# Altium PCB PCB_Awg.PcbDoc
Units mm, origin at the board's own origin, x right, y up, seen from the top; angles counter-clockwise.
Board outline 152.4 x 101.6 mm, 2 copper layers (Top Layer, Bottom Layer); 100 components, 70 nets, 284 pads, 0 vias.
Unrouted connection lines stored in the file: 197.
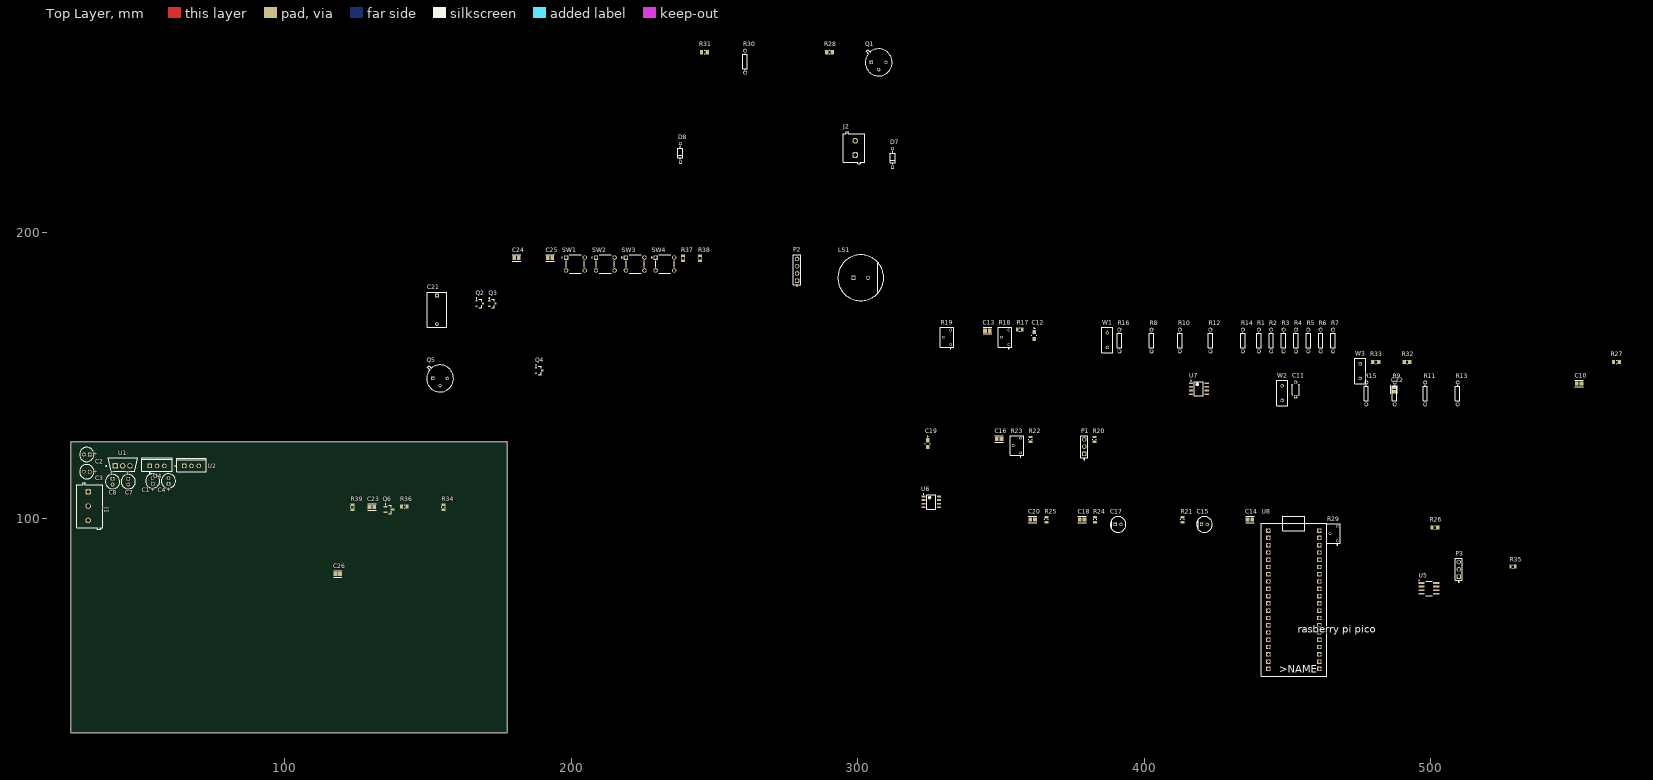
[diagram p0: Top Layer view]
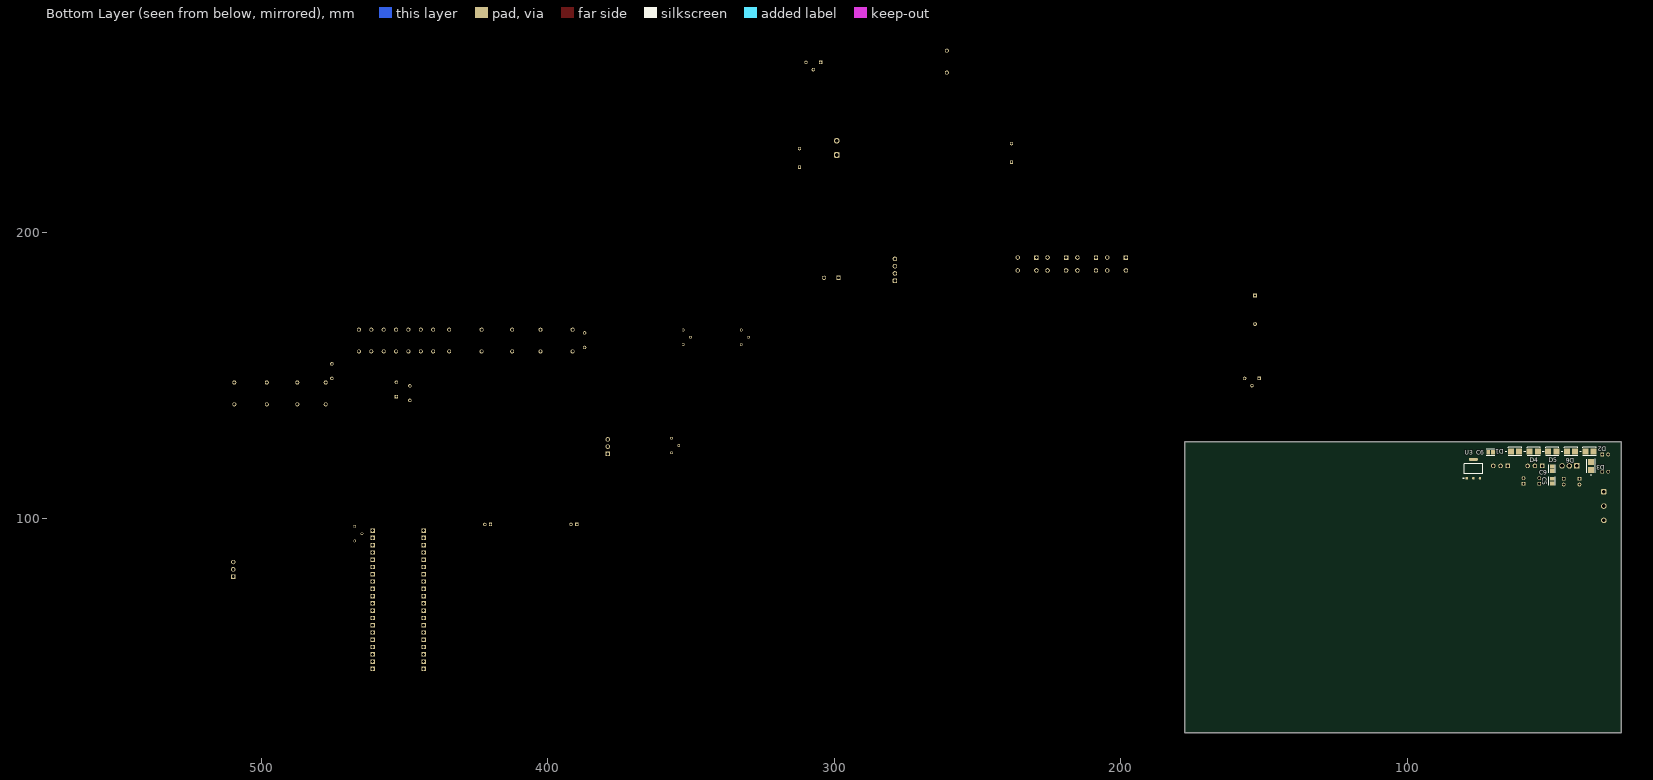
[diagram p1: Bottom Layer view, seen from below]

## Layer stack, top to bottom
Top Solder: solder mask 0.0102, Solder Resist, Dk 3.5
Top Layer: signal copper 0.0356
Dielectric 1: dielectric 0.32, FR-4, Dk 4.8
Bottom Layer: signal copper 0.0356
Bottom Solder: solder mask 0.0102, Solder Resist, Dk 3.5

## Board outline
25.4,25.4 177.8,25.4 177.8,127 25.4,127

## Design rules (kind name [scope] priority, off if disabled: settings)
Clearance [All] p1: gap=0.254 ignorepadtopadclearanceinfootprint=FALSE except(0: Arc-Hole Track-Hole SMDPad-Hole THPad-Hole Via-Hole Fill-Hole Poly-Hole Region-Hole Text-Hole)
PolygonConnect [All] p1: connectstyle=Relief reliefconductorwidth=0.254 reliefentries=4 polygonreliefangle="90 Angle" airgapwidth=0.254
RoomDefinition Alimentacion [InComponentClass('Alimentacion')] p1: confinementstyle=ConfineIn formatcopy=TRUE lockcomponents=FALSE outline 27,125.5 27,94.5 40,94.5 40,108 87,108 87,125.5
RoomDefinition Salida [InComponentClass('Salida')] p2: confinementstyle=ConfineIn formatcopy=TRUE lockcomponents=FALSE outline 34.2,55 85,55 85,80.4 34.2,80.4
RoomDefinition Control [InComponentClass('Control')] p3: confinementstyle=ConfineIn formatcopy=TRUE lockcomponents=FALSE outline 107.2,28.1 158,28.1 158,53.5 107.2,53.5
RoomDefinition Perifericos [InComponentClass('Perifericos')] p4: confinementstyle=ConfineIn formatcopy=TRUE lockcomponents=FALSE outline 178.943,162.941 309.499,162.941 309.499,211.963 178.943,211.963
RoutingVias [All] p1: holewidth=0.711 width=1.27 viastyle="Through Hole" minholewidth=0.711 minwidth=1.27 maxholewidth=0.711 maxwidth=1.27
SolderMaskExpansion [All] p1: expansion=0.102 istentingtop=FALSE
Width [All] p1: maxlimit=0.254 minlimit=0.254 preferedwidth=0.254
30 further rules are at their usual default settings.

## Classes and differential pairs
component class Salida: C21 C22 D7 D8 J2 Q1 Q2 Q3 Q4 Q5 R26 R27 R28 R29 R30 R31 R32 R33 W3
component class Perifericos: C23 C24 C25 C26 LS1 P2 P3 Q6 R34 R35 R36 R37 R38 R39 SW1 SW2 SW3 SW4
component class Control: C10 C11 C12 C13 C14 C15 C16 C17 C18 C19 C20 P1 R1 R2 R3 R4 R5 R6 R7 R8 R9 R10 R11 R12 R13 R14 R15 R16 R17 R18 R19 R20 R21 R22 R23 R24 R25 U5 U6 U7 U8 W1 W2
component class Alimentacion: C1 C2 C3 C4 C5 C6 C7 C8 C9 D1 D2 D3 D4 D5 D6 J1 U1 U2 U3 U4

## Components (designator, comment, footprint, x,y, rotation, side; value= is the part's Value field where it differs from the comment)
C1 "0.33uF" CAPPR55-200-1100X500X1200 54,113.25 r90 top
C2 "0.33uF" CAPPR55-200-1100X500X1200 31,122.5 r180 top
C3 "1uF" CAPPR55-200-1100X500X1200 31,116.5 r180 top
C4 "1uF" CAPPR55-200-1100X500X1200 59.5,113.25 r90 top
C5 "100nF" FP-0805-L_2_01_0_2-W_1_25-IPC_B 49.5,113.194 r90 bottom
C6 "100nF" FP-0805-L_2_01_0_2-W_1_25-IPC_B 71,123.25 r180 bottom
C7 "0.33uF" CAPPR55-200-1100X500X1200 45.5,113 r270 top
C8 "1uF" CAPPR55-200-1100X500X1200 40,113 r270 top
C9 "100nF" FP-0805-L_2_01_0_2-W_1_25-IPC_B 49.5,117.5 r90 bottom
C10 "22pF" FP-0805-L_2_01_0_2-W_1_25-IPC_B 551.835,147.236 r0 top
C11 "10nF/Poliester-Ceramico" FP-RCE0K1-MFG 452.902,145.204 r90 top
C12 "2.2uF/Tantalio" FP-T491A225K010AT-MFG 361.68,164.038 r90 top
C13 "10nF/Ceramico" FP-0805-L_2_01_0_2-W_1_25-IPC_B 345.297,165.689 r0 top
C14 "22pF" FP-0805-L_2_01_0_2-W_1_25-IPC_B 436.9,99.865 r0 top
C15 "10uF" FP-RAD-TH-D_5_0_5-L_11_1-MFG 421.025,98.087 r0 top
C16 "10nF/Ceramico" FP-0805-L_2_01_0_2-W_1_25-IPC_B 349.393,127.91 r0 top
C17 "10uF" FP-RAD-TH-D_5_0_5-L_11_1-MFG 390.926,98.087 r0 top
C18 "100nF" FP-0805-L_2_01_0_2-W_1_25-IPC_B 378.353,99.865 r0 top
C19 "2.2uF/Tantalio" FP-T491A225K010AT-MFG 324.501,126.259 r90 top
C20 "100nF" FP-0805-L_2_01_0_2-W_1_25-IPC_B 361.081,99.865 r0 top
C21 "Desacople" FP-ECQ-E2564KB-MFG 153.2,173 r270 top
C22 "100nF" FP-0805-L_2_01_0_2-W_1_25-IPC_B 487.2,145.194 r90 top
C23 "100nF" FP-0805-L_2_01_0_2-W_1_25-IPC_B 130.513,104.201 r0 top
C24 "100nF" FP-0805-L_2_01_0_2-W_1_25-IPC_B 180.975,191.135 r0 top
C25 "100nF" FP-0805-L_2_01_0_2-W_1_25-IPC_B 192.659,191.135 r0 top
C26 "100nF" FP-0805-L_2_01_0_2-W_1_25-IPC_B 118.575,80.833 r0 top
D1 "1N4007 SMD" FP-1N4007_SMD-IPC_C 62.5,123.5 r180 bottom
D2 "1N4007 SMD" FP-1N4007_SMD-IPC_C 36.5,123.5 r180 bottom
D3 "1N4007 SMD" FP-1N4007_SMD-IPC_C 36,118.45 r90 bottom
D4 "1N4007 SMD" FP-1N4007_SMD-IPC_C 55.95,123.5 r180 bottom
D5 "1N4007 SMD" FP-1N4007_SMD-IPC_C 49.5,123.5 r180 bottom
D6 "1N4007 SMD" FP-1N4007_SMD-IPC_C 42.95,123.5 r180 bottom
D7 "1N4148TR" FP-6_560-5004_12-4-MFG 312.2,226 r90 top
D8 "1N4148TR" FP-6_560-5004_12-4-MFG 238.2,227.75 r90 top
J1 "691101710003" 691101710003 32,104.5 r270 top
J2 "Señal_Salida" 691102710002 298.75,229.5 r90 top
LS1 "Buzzer 5V" FP-SDC1610M5-01-MFG 301.117,184.15 r0 top
P1 "J_Etapa_Realm" MOLX-22-28-4033_V 379.111,125.243 r90 top
P2 "61300411121" 61300411121 278.892,186.944 r90 top
P3 "22-28-4033" MOLX-22-28-4033_V 509.822,82.423 r90 top
Q1 "2N2219A" FP-TO-39-MFG 307.377,259.343 r0 top
Q2 "BC847B" INF-SOT23_L 168.142,175.203 r0 top
Q3 "BC847B" INF-SOT23_L 172.587,175.203 r0 top
Q4 "BC847B" INF-SOT23_L 188.843,151.835 r0 top
Q5 "2N2905A" FP-TO-39-MFG 154.299,149.041 r0 top
Q6 "BC847B" INF-SOT23_M 136.482,103.312 r0 top
R1 "Res1" AXIAL-0.3 440.039,162.26 r90 top value=1.2K
R2 "Res1" AXIAL-0.3 444.357,162.26 r90 top value=1.2K
R3 "Res1" AXIAL-0.3 448.675,162.26 r90 top value=1.2K
R4 "Res1" AXIAL-0.3 452.993,162.26 r90 top value=1.2K
R5 "Res1" AXIAL-0.3 457.311,162.26 r90 top value=1.2K
R6 "Res1" AXIAL-0.3 461.629,162.26 r90 top value=1.2K
R7 "Res1" AXIAL-0.3 465.947,162.26 r90 top value=1.2k
R8 "Res1" AXIAL-0.3 402.574,162.26 r90 top value=2.4K
R9 "Res1" AXIAL-0.3 487.446,143.807 r90 top value=2.4K
R10 "Res1" AXIAL-0.3 412.48,162.26 r90 top value=2.4K
R11 "Res1" AXIAL-0.3 498.114,143.807 r90 top value=2.4K
R12 "Res1" AXIAL-0.3 423.148,162.26 r90 top value=2.4K
R13 "Res1" AXIAL-0.3 509.417,143.807 r90 top value=2.4K
R14 "MSB" AXIAL-0.3 434.451,162.26 r90 top value=2.4K
R15 "LSB" AXIAL-0.3 477.54,143.807 r90 top value=2.4K
R16 "Res1" AXIAL-0.3 391.398,162.26 r90 top value=2.4K
R17 "2.2k" RESC2013X50X30LL20T20 356.6,166.07 r0 top
R18 "10k" BOUR-3266W-3_V 351.52,163.403 r90 top
R19 "10k" BOUR-3266W-3_V 331.2,163.403 r90 top
R20 "1k" RESC2013X50X30LL20T20 382.667,127.783 r90 top
R21 "10k" RESC2013X50X30LL20T20 413.405,99.738 r90 top
R22 "10k" RESC2013X50X30LL20T20 360.315,127.783 r90 top
R23 "10k" BOUR-3266W-3_V 355.616,125.624 r90 top
R24 "10k" RESC2013X50X30LL20T20 382.925,99.738 r90 top
R25 "2.2k" RESC2013X50X30LL20T20 365.907,99.738 r90 top
R26 "33k" RESC2013X60X35ML10T20 501.477,97.037 r0 top
R27 "33k" RESC2013X60X35ML10T20 564.807,154.756 r0 top
R28 "0.33" RESC2013X60X35ML10T20 290.232,262.899 r0 top
R29 "10k" BOUR-3266W-3_V 466.171,94.878 r90 top
R30 "Res1" AXIAL-0.3 260.768,259.597 r90 top value=50-1%
R31 "0.33" RESC2013X60X35ML10T20 246.544,262.899 r0 top
R32 "10" RESC2013X60X35ML10T20 491.782,154.756 r0 top
R33 "0.33" RESC2013X60X35ML10T20 480.86,154.756 r0 top
R34 "10k" RESC2013X50X30LL20T20 155.532,104.074 r90 top
R35 "10k" RESC2013X50X30LL20T20 528.702,83.373 r0 top
R36 "5.6k" RESC2013X50X30NL20T20 141.816,104.328 r0 top
R37 "10k" RESC2013X50X30LL20T20 239.141,191.008 r90 top
R38 "10k" RESC2013X50X30LL20T20 244.983,191.008 r90 top
R39 "10k" RESC2013X50X30LL20T20 123.782,104.074 r90 top
SW1 "RUN" FP-EVQ-PAC07K-MFG 201.549,188.976 r0 top
SW2 "AVANCE" FP-EVQ-PAC07K-MFG 211.963,188.976 r0 top
SW3 "ATRAS" FP-EVQ-PAC07K-MFG 222.377,188.976 r0 top
SW4 "MULT/START" FP-EVQ-PAC07K-MFG 232.791,188.976 r0 top
U1 "LM7815CT/NOPB" FP-NDE0003B-MFG 43.54,119.072 r90 top
U2 "LM7805CT" FAIR-TO-220-3 67.54,118.5 r90 top
U3 "AMS1117-3.3" FP-AMS1117-IPC_C 77,117.5 r90 bottom
U4 "LM7915CT/NOPB" NDE0003A 55.54,118.5 r0 top
U5 "X9C103SIZT1" M8_15_MFG 499.375,75.77 r0 top
U6 "LM6172" D0008A_N 325.726,105.964 r0 top
U7 "LM358" ONSC-SOIC-8-751-07_V 419.12,145.458 r0 top
U8 "RASPBERRY_PI_PICO" RASPBERRY_PI_PICO 452.267,73.068 r0 top
W1 "J_Etapa1" RAD-0.2 387.207,162.387 r90 top
W2 "J_Etapa2" RAD-0.2 448.203,143.934 r90 top
W3 "Jumper" RAD-0.2 475.399,151.581 r90 top

## Footprints (in the part's own frame and the unit in brackets; to place one, negate y for a bottom-side part, rotate by r counter-clockwise, add the part's x,y. Pads: shape width x height; smd on the part's side, far side on the other; paste and mask are expansions set on the pad)
61300411121 [mm] "Pin Header, pitch 2.54 mm, THT, Vertical, single row, 4p"
  rrect50% 1.6x1.6 hole 1.1: 1(-3.81,0)
  round 1.6 hole 1.1: 2(-1.27,0) 3(1.27,0) 4(3.81,0)
  silkscreen extent -5.8,-1.35 5.23,1.35, body extent -5.08,-1.27 5.08,1.27, height 8.57
691101710003 [mm] "5,00mm - modular - blue - Horizontal entry with pressure clamp - 12,6mm height - 03p"
  rrect50% 1.95x1.95 hole 1.3: 1(-5,-0.5)
  round 1.95 hole 1.3: 2(0,-0.5) 3(5,-0.5)
  silkscreen extent -8.1,-4.5 8.1,4.5, body extent -8.1,-4.5 8.1,4.5, height 12.65
691102710002 [mm] "5,00mm - modular - blue - Horizontal entry with pressure clamp - 9,9 mm height - 02p"
  rrect50% 1.95x1.95 hole 1.3: 1(-2.5,-0.45)
  round 1.95 hole 1.3: 2(2.5,-0.45)
  silkscreen extent -5.6,-3.75 5.6,3.75, body extent -5.6,-3.75 5.6,3.75, height 9.96
AXIAL-0.3 [mm] "Axial Device, Thru-Hole; 2 Leads; 0.3 in Pin Spacing"
  round 1.4 hole 0.85: 1(-3.81,0) 2(3.81,0)
  silkscreen extent -2.77,-0.76 2.77,0.76
BOUR-3266W-3_V [mm] "THD, 3-Leads, Body 6.6x4.69mm, Pitch 2.54mm"
  round 0.95 hole 0.65: 1(-2.54,-1.27) 2(0,1.27) 3(2.54,-1.27)
  silkscreen extent -4.02,-2.34 3.42,2.34, body extent -3.3,-2.35 3.3,2.35, height 8.51
CAPPR55-200-1100X500X1200 [mm] "THD, 2-Leads, Dia 5mm, Body Length 11mm"
  rect 1.3x1.3 hole 0.8: 1(-1,0)
  round 1.3 hole 0.8: 2(1,0)
  silkscreen extent -2.5,-2.5 2.5,2.5, body extent -2.5,-2.5 2.5,2.5, height 12
D0008A_N [mm] "SOIC, 8-Leads, Body 5x4mm, Pitch 1.27mm, IPC Medium Density"
  rrect17% 1.45x0.6 smd: 1(-2.725,1.905) 2(-2.725,0.635) 3(-2.725,-0.635) 4(-2.725,-1.905) 5(2.725,-1.905) 6(2.725,-0.635) 7(2.725,0.635) 8(2.725,1.905)
  silkscreen extent -2.85,-2.5 1.6,2.88, body extent -3,-2.45 3,2.45, height 1.63
FAIR-TO-220-3 [mm] "FM, 3-Leads, Body 10.2x4.7mm, Pitch 2.54mm"
  rect 1.6x1.6 hole 1: 1(0,2.54)
  round 1.6 hole 1: 2(0,0) 3(0,-2.54)
  silkscreen extent -2.04,-5.1 2.66,5.87, body extent -2.04,-5.1 2.66,5.1, height 18.95
FP-1N4007_SMD-IPC_C [mm]
  rect 2.1x2 smd paste+0 mask+0: 1(-1.45,0) 2(1.45,0)
  silkscreen extent -3.25,-1.45 2.3,1.45, body extent -2.52,-1.35 2.52,1.35, height 2.62
FP-6_560-5004_12-4-MFG [mm]
  rect 1.2x1.2 hole 0.7 paste-1000 mask+0: 1(-3.25,0)
  round 1.2 hole 0.7 paste-1000 mask+0: 2(3.25,0)
  silkscreen extent -2.25,-0.87 2.25,0.87, body extent -3.95,-0.97 3.95,0.97, height 0.25
FP-0805-L_2_01_0_2-W_1_25-IPC_B [mm]
  rect 1.305x1.456 smd paste+0 mask+0: 1(-0.806,0) 2(0.806,0)
  silkscreen extent -1.46,-1.13 1.46,1.13, body extent -1,-0.63 1,0.63, height 1.4
FP-AMS1117-IPC_C [mm]
  rect 1.004x0.872 smd paste+0 mask+0: 1(-3.295,2.29)
  rrect100% 1.004x0.872 smd paste+0 mask+0: 2(-3.295,0) 3(-3.295,-2.29)
  rrect87% 1.004x3.182 smd paste+0 mask+0: 4(3.295,0)
  silkscreen extent -3.42,-3.25 1.75,3.63, body extent -3.53,-3.25 3.53,3.25, height 1.8
FP-ECQ-E2564KB-MFG [mm]
  rect 1.3x1.3 hole 0.8 paste-1000 mask+0: 1(-5,0)
  round 1.3 hole 0.8 paste-1000 mask+0: 2(5,0)
  silkscreen extent -6.15,-3.35 6.15,3.35, body extent -6.25,-3.45 6.25,3.45, height 0.25
FP-EVQ-PAC07K-MFG [mm]
  rect 1.55x1.55 hole 1 paste-1000 mask+0: A(-3.25,2.25)
  round 1.55 hole 1 paste-1000 mask+0: A'(-3.25,-2.25) B(3.25,2.25) B'(3.25,-2.25)
  silkscreen extent -4.77,-3.15 3.15,3.15, body extent -4.13,-3.25 4.13,3.25, height 0.25
FP-NDE0003B-MFG [mm]
  rect 1.9x1.9 hole 1.25 paste-1000 mask+0: 1(-0.573,2.54)
  round 1.9 hole 1.25 paste-1000 mask+0: 2(-0.573,0) 3(-0.573,-2.54)
  silkscreen extent -2.35,-5.27 2.35,5.89, body extent -2.45,-5.37 2.45,5.37, height 0.25
FP-RAD-TH-D_5_0_5-L_11_1-MFG [mm]
  rect 1.2x1.2 hole 0.7 paste-1000 mask+0: 1(-1,0)
  round 1.2 hole 0.7 paste-1000 mask+0: 2(1,0)
  silkscreen extent -2.75,-2.75 2.75,2.75, body extent -2.85,-2.85 2.85,2.85, height 0.25
FP-RCE0K1-MFG [mm]
  rect 1.2x1.2 hole 0.7 paste-1000 mask+0: 1(-2.5,0)
  round 1.2 hole 0.7 paste-1000 mask+0: 2(2.5,0)
  silkscreen extent -1.8,-1.25 1.8,1.25, body extent -3.2,-1.35 3.2,1.35, height 0.25
FP-SDC1610M5-01-MFG [mm]
  rect 1.45x1.45 hole 0.95 paste-1000 mask+0: 1(-2.5,0)
  round 1.45 hole 0.95 paste-1000 mask+0: 2(2.5,0)
  silkscreen extent -8,-8 8,8, body extent -8.1,-8.1 8.1,8.1, height 0.25
FP-T491A225K010AT-MFG [mm]
  rect 1.42x1.13 smd paste+0 mask+0: 1(-1.2,0) 2(1.2,0)
  silkscreen extent -0.12,-0.9 2.8,0.9, body extent -2.03,-1.02 2.03,1.02, height 0.25
FP-TO-39-MFG [mm]
  rect 1.2x1.2 hole 0.7 paste-1000 mask+0: 1(-2.54,0)
  round 1.2 hole 0.7 paste-1000 mask+0: 2(0,-2.54) 3(2.54,0)
  silkscreen extent -4.69,-4.7 4.7,4.69, body extent -4.8,-4.8 4.8,4.8, height 0.25
INF-SOT23_L [mm] "SOT23, 3-Leads, Body 2.9x1.3 mm, Pitch 0.95 mm, IPC High Density"
  rect 0.75x0.6 smd: 1(-1.1,0.95) 2(-1.1,-0.95) 3(1.1,0)
  silkscreen extent -1.22,-1.5 0.7,1.92, body extent -0.7,-1.5 0.7,1.5, height 1.1
INF-SOT23_M [mm] "SOT23, 3-Leads, Body 2.9x1.3 mm, Pitch 0.95 mm, IPC Low Density"
  rect 1.35x0.6 smd: 1(-1.2,0.95) 2(-1.2,-0.95) 3(1.2,0)
  silkscreen extent -1.32,-1.5 0.7,1.92, body extent -0.7,-1.5 0.7,1.5, height 1.1
M8_15_MFG [mm] "Recommended Land Pattern"
  rect 2.2x0.6 smd: 1(-2.6,1.905) 2(-2.6,0.635) 3(-2.6,-0.635) 4(-2.6,-1.905) 5(2.6,-1.905) 6(2.6,-0.635) 7(2.6,0.635) 8(2.6,1.905)
  silkscreen extent -3.57,-2.56 1.12,2.83, body extent -3.8,-2.75 3.8,2.75, height 0.25
MOLX-22-28-4033_V [mm] "THD, 3-Leads, Body 7.62x2.49mm, Pitch 2.54mm"
  rect 1.55x1.55 hole 1.02: 1(-2.54,0)
  round 1.55 hole 1.02: 2(0,0) 3(2.54,0)
  silkscreen extent -4.58,-1.24 3.81,1.24, body extent -3.81,-1.24 3.81,1.24, height 8.38
NDE0003A [mm] "FM, 3-Leads, Body 10.7x4.7mm, Pitch 2.54mm"
  rect 1.6x1.6 hole 1: 1(-2.54,0)
  round 1.6 hole 1: 2(0,0) 3(2.54,0)
  silkscreen extent -5.35,-2.62 5.35,2.85, body extent -5.4,-1.9 5.4,2.9, height 19.4
ONSC-SOIC-8-751-07_V [mm] "SOIC, 8-Leads, Body 4.9x3.9mm, Pitch 1.27mm"
  rect 1.52x0.6 smd: 1(-2.74,1.905) 2(-2.74,0.635) 3(-2.74,-0.635) 4(-2.74,-1.905) 5(2.74,-1.905) 6(2.74,-0.635) 7(2.74,0.635) 8(2.74,1.905)
  silkscreen extent -2.86,-2.45 1.58,2.88, body extent -1.95,-2.45 1.95,2.45, height 1.75
RAD-0.2 [mm] "Radial Cap, Thru-Hole; 2 Leads; 0.2 in Pin Spacing"
  round 1.2 hole 0.7: 1(-2.54,0) 2(2.54,0)
  silkscreen extent -4.44,-1.91 4.44,1.91
RASPBERRY_PI_PICO [mm]
  rect 1.508x1.508 / inner round 1.508 / far side rect 1.508x1.508 hole 1: 3V3(8.89,12.7) 3V3_EN(8.89,15.24) ADC_VREF(8.89,10.16) AGND(8.89,5.08) GND(8.89,17.78) GND2(8.89,-7.62) GND3(8.89,-20.32) GND4(-8.89,17.78) GND5(-8.89,5.08) GND6(-8.89,-7.62) GND7(-8.89,-20.32) GP0(-8.89,22.86) GP1(-8.89,20.32) GP2(-8.89,15.24) GP3(-8.89,12.7) GP4(-8.89,10.16) GP5(-8.89,7.62) GP6(-8.89,2.54) GP7(-8.89,0) GP8(-8.89,-2.54) GP9(-8.89,-5.08) GP10(-8.89,-10.16) GP11(-8.89,-12.7) GP12(-8.89,-15.24) GP13(-8.89,-17.78) GP14(-8.89,-22.86) GP15(-8.89,-25.4) GP16(8.89,-25.4) GP17(8.89,-22.86) GP18(8.89,-17.78) GP19(8.89,-15.24) GP20(8.89,-12.7) GP21(8.89,-10.16) GP22(8.89,-5.08) GP26_A0(8.89,0) GP27_A1(8.89,2.54) GP28_A2(8.89,7.62) RUN(8.89,-2.54) VBUS(8.89,22.86) VSYS(8.89,20.32)
  silkscreen extent -11.43,-27.94 11.43,27.94
RESC2013X50X30LL20T20 [mm] "Chip Resistor, 2-Leads, Body 2.00x1.25mm, IPC High Density"
  rect 0.85x1.35 smd: 1(-0.825,0) 2(0.825,0)
  silkscreen extent -0.1,-0.58 0.1,0.58, body extent -1.1,-0.72 1.1,0.72, height 0.5
RESC2013X50X30NL20T20 [mm] "Chip Resistor, 2-Leads, Body 2.00x1.25mm, IPC Medium Density"
  rect 1.05x1.45 smd: 1(-0.925,0) 2(0.925,0)
  silkscreen extent -0.1,-0.63 0.1,0.63, body extent -1.1,-0.72 1.1,0.72, height 0.5
RESC2013X60X35ML10T20 [mm] "Chip Resistor, 2-Leads, Body 2.1x1.35mm, IPC Low Density"
  rect 1.2x1.45 smd: 1(-1,0) 2(1,0)
  silkscreen extent -0.1,-0.63 0.1,0.63, body extent -1.05,-0.68 1.05,0.67, height 0.6

## Part data
C1 C2 C3 C4 C7 C8: library part CMP-1665-00039-1, "Aluminum Electrolytic Capacitor, 1 uF, +/- 20%, 50 V, -55 to 105 degC, 2-Pin THD, RoHS, Bulk", Max Operating Temperature="70 degC", Min Operating Temperature="-30 degC", Package Quantity=150, Channels=2, ComponentLink1Description="Manufacturer URL", ComponentLink1URL=http://www.panasonic.com/, ComponentLink2Description=Datasheet, ComponentLink2URL=https://datasheet.ciiva.com/7275/94060-7275472.pdf, DatasheetVersion=Mar-05, Mount="Through Hole", PackageDescription="2-Pin Radial Lead, Dia 5 mm, Body Length 11 mm", PackageReference=CAPPR55-200-1100X500X1200, Packaging=Bulk, Radiation Hardening=No, RoHSCompliant=true
C5 C6 C9 C18 C20 C22 C23 C24 C25 C26: library part CMP-2007-04174-2, "General Purpose Ceramic Capacitor, 0805, 100nF, 10%, X7R, 15%, 100V", Case Code (Imperial)=0805, Case Code (Metric)=2012, Dielectric=X7R, Dielectric Material=Ceramic, Max Operating Temperature=125°C, Min Operating Temperature=-55°C, Package Quantity=2000, Tolerance=10%, Voltage=100V, Capacitance=100nF, Case/Package=0805, Construction=Flat, Contact Plating=Tin, Depth=1.25mm, Height=1.4mm, Lead Free="Lead Free", Length=2.01mm, Mount="Surface Mount", Number of Pins=2, Packaging="Tape and Reel", Radiation Hardening=No, REACH SVHC="No SVHC", RoHS Compliant=Yes, Series=-, Termination=SMD/SMT, Thickness=0.055inch, Voltage Rating=100V, Voltage Rating (DC)=100V, Width=0.049inch
C10 C13 C14 C16: library part CMP-2007-04174-2, "General Purpose Ceramic Capacitor, 0805, 100nF, 10%, X7R, 15%, 100V", Capacitance=100nF, Case Code (Imperial)=0805, Case Code (Metric)=2012, Dielectric=X7R, Dielectric Material=Ceramic, Max Operating Temperature=125°C, Min Operating Temperature=-55°C, Package Quantity=2000, Tolerance=10%, Voltage=100V, Case/Package=0805, Construction=Flat, Contact Plating=Tin, Depth=1.25mm, Height=1.4mm, Lead Free="Lead Free", Length=2.01mm, Mount="Surface Mount", Number of Pins=2, Packaging="Tape and Reel", Radiation Hardening=No, REACH SVHC="No SVHC", RoHS Compliant=Yes, Series=-, Termination=SMD/SMT, Thickness=0.055inch, Voltage Rating=100V, Voltage Rating (DC)=100V, Width=0.049inch
C11: library part CMP-06035-028919-1, "Cap Ceramic 5pF 100V C0G ±0.25pF Radial 5mm +125°C Automotive Bulk", Capacitance=5pF, Case/Package=Radial, Dielectric=C0G, Max Operating Temperature=125°C, Min Operating Temperature=-55°C, Package Quantity=500, Ratings=AEC-Q200, Resistor Type=Ceramic, Voltage Rating=100V, Height=3.5mm, Height - Seated (Max)=0.138inch, Lead Diameter=0.5mm, Lead Pitch=0.197inch, Lead/Base Style="Formed Leads", Length=0.142inch, Mount="Through Hole", Packaging=Bulk, Termination=Radial, Voltage Rating (DC)=100V, Width=2.5mm
C12 C19: library part CMP-03017-000061-1, "CAP TANT 2.2UF 10% 10V 1206", Capacitance=2.2uF, Case Code (Imperial)=1206, Case Code (Metric)=3216, Dielectric Material=Tantalum, ESR (Equivalent Series Resistance)=8R, Leakage Current=500nA, Max Operating Temperature=125°C, Min Operating Temperature=-55°C, Package Quantity=1, Ripple Current=97mA, Tolerance=10%, Voltage=10V, Case/Package=1206, Depth=1.6mm, Dissipation Factor=6%, Features="General Purpose", Height=1.6mm, Height - Seated (Max)=0.071inch, Lead Free="Lead Free", Length=3.2mm, Life (Hours)=2000Hour, Mount="Surface Mount", Number of Pins=2, Packaging="Tape and Reel", Polarity=Polar, Radiation Hardening=No, REACH SVHC="No SVHC", RoHS Compliant=Yes, Termination=SMD/SMT, Voltage Rating=10V, Voltage Rating (DC)=10V, Width=1.6mm
C15 C17: library part CMP-05427-001517-1, "Aluminum Electrolytic Capacitors (Radial Lead Type) 10uF ±20% 63V", Case/Package=Radial, Dielectric Material=Aluminium, Leakage Current=3uA, Max Operating Temperature=85°C, Min Operating Temperature=-40°C, Package Quantity=200, Ripple Current=70mA, Tolerance=20%, Voltage=63V, Capacitance=10uF, Construction=RADIAL, Diameter=5mm, Dissipation Factor=0.11%, Height=11mm, Height - Seated (Max)=0.472inch, Lead Diameter=0.5mm, Lead Free="Lead Free", Lead Pitch=2mm, Lead/Base Style=Straight, Length=11mm, Life (Hours)=2000Hour, Mount="Through Hole", Packaging=Bulk, Radiation Hardening=No, REACH SVHC="No SVHC", RoHS Compliant=Yes, Series=M, Termination=Radial, Voltage Rating=63V, Voltage Rating (DC)=63V, Width=5mm
C21: library part CMP-00287-39488477-1, "ECQ-E2564KB Cap Film 0.56uF 250V PET 10% (12.3 X 6.7 X 11.9mm) Radial 10mm 105°C Bulk", Capacitance=560nF, Case/Package=Radial, Dielectric=PET, Dielectric Material=Polyester, Max Operating Temperature=105°C, Min Operating Temperature=-40°C, Tolerance=10%, Voltage=250V, Depth=6.7mm, Height=13mm, Height - Seated (Max)=12.9032mm, Lead Diameter=600µm, Lead Free="Lead Free", Lead Length=20mm, Lead Pitch=10mm, Lead/Base Style=Straight, Length=12.3mm, Mount="PCB, Radial, Through Hole", NexarPartId=39488477, Packaging=Bulk, REACH SVHC=Unknown, RoHS=Compliant, Schedule B="8532250070, 8532250070", Termination=Radial, Voltage Rating (DC)=250V, Width=6.7056mm
D1 D2 D3 D4 D5 D6: library part CMP-12389-000001-1, "Rectifier, 1Kv, 1A, Do-214Ac Rohs Compliant: Yes"
D7 D8: library part CMP-02540-000029-2, "DIODE GEN PURP 75V 300MA DO35", Current Rating=150A, Forward Current=300mA, Forward Voltage=1V, Max Operating Temperature=175°C, Max Repetitive Reverse Voltage (Vrrm)=100V, Min Operating Temperature=-65°C, Peak Non-Repetitive Surge Current=2A, Power Dissipation=440mW, Element Configuration=Single, Lead Free="Lead Free", Mount="Through Hole", Number of Pins=2, Packaging="Tape and Reel", Reverse Recovery Time=8ns
J1: library part CMP-1502-03257-2, Color=Blue, Current=16A, Max Operating Temperature=105°C, Min Operating Temperature=-40°C, Voltage=250V, Contact Material=Brass, Contact Plating=Tin, Current Rating=16A, Height=16.4mm, Housing Material=Nylon, Lead Pitch=5mm, Length=9mm, Mount="Through Hole", NexarPartId=8917705, Number of Contacts=3, Number of Levels=1, Number of Pins=3, Number of Positions Per Level=3, Packaging=Box, Pitch=5.0038mm, Plating=Steel, REACH SVHC=Unknown, RoHS=Compliant, Stripping Length=-7mm, Termination=Screw, Voltage Rating=250V, Width=16.2mm, Wire Gauge (Max)=26AWG, Wire Gauge (Min)=14AWG, Wire/Cable Gauge=26AWG
J2: library part CMP-1502-03258-2, Color=Blue, Current=15A, Max Operating Temperature=105°C, Min Operating Temperature=-40°C, Voltage=300V, Contact Material=Brass, Contact Plating=Tin, Current Rating=15A, Height=13.4mm, Housing Material=Nylon, Lead Pitch=5mm, Length=7.5mm, Mount="Through Hole", NexarPartId=8917706, Number of Contacts=2, Number of Levels=1, Number of Pins=2, Number of Positions Per Level=2, Packaging=Box, Pitch=5.0038mm, Plating=Steel, REACH SVHC=Unknown, RoHS=Compliant, Stripping Length=-6mm, Termination=Screw, Voltage Rating=300V, Width=11.2mm, Wire Gauge (Max)=22AWG, Wire Gauge (Min)=14AWG, Wire/Cable Gauge=22AWG
LS1: library part CMP-08413-000008-1, "AUDIO MAGNETIC INDICATOR 4-8V TH", Frequency=2.4kHz, Max Operating Temperature=70°C, Max Supply Current=30mA, Min Operating Temperature=-10°C, Nominal Supply Voltage (DC)=5V, Diameter=16mm, Height=10mm, Input Type=DC, Lead Free="Lead Free", Mount="Through Hole", Number of Pins=2, Number of Terminals/Pins=2, Operating Supply Current=30mA, Packaging=Tray, Sensing Method=Magnetic, Series=SDC, Termination="PC Pins", Voltage Rating=5V
P1 P3: library part CMP-1676-00001-5, "Male Header, Pitch 2.54 mm, 1 x 3 Position, Height 8.38 mm, Tail Length 3.18 mm, RoHS, Bulk", Colour=Black, Current Rating="4 A", Manufacturer=Molex, Max Operating Temperature="75 degC", Min Operating Temperature="0 degC", Package Quantity=1, Voltage Rating="250 V", ComponentLink1Description="Manufacturer URL", ComponentLink1URL=http://www.molex.com/, ComponentLink2Description=Datasheet, ComponentLink2URL=http://www.molex.com/pdm_docs/sd/022284033_sd.pdf, Contact Finish=Gold, Contact Material=Brass, Contact Plating=Gold, DatasheetVersion="Rev. G, 01/2012", Height="8.38 mm", Lead Pitch="0.1 inch", Length="7.62 mm", Mount="Through Hole", Mounting Technology="Through Hole", PackageDescription="Male Header, Pitch 2.54 mm, 1 x 3 Position, Height 8.38 mm, Tail Length 3.18 mm", PackageReference=22-28-4033, Packaging=Bulk, Pins=3, REACH SVHC=Unknown, RoHSCompliant=true, Rows=1
P2: library part CMP-1502-01064-3, Color=Black, Contact Resistance=20mΩ, Current Rating=3A, Max Operating Temperature=105°C, Min Operating Temperature=-40°C, Operating Supply Voltage=250V, Connector Type="Male Pin", Contact Material=Copper, Contact Mating Length=5.9944mm, Contact Plating=Gold, Gender=Male, Height=8.89mm, Lead Free="Lead Free", Lead Pitch=2.54mm, Mount="Through Hole", NexarPartId=32855522, Number of Contacts=4, Number of Pins=4, Number of Positions=4, Number of Rows=1, Orientation=Vertical, Packaging=Bulk, Pitch=2.54mm, REACH SVHC=Unknown, RoHS=Compliant, Termination=Solder, Voltage Rating=250V
Q1: library part CMP-06366-000015-1, "TRANS NPN 50V 0.8A TO-39"
Q2 Q3 Q4 Q6: library part CMP-1177-00042-1, "NPN Silicon AF Transistor, 45 V VCEO, 100 mA IC, SOT23, Reel, Green", Manufacturer=Infineon, ComponentLink1Description="Manufacturer URL", ComponentLink1URL=http://www.infineon.com/, ComponentLink2Description=Datasheet, ComponentLink2URL=http://www.infineon.com/dgdl/bc847series_bc848series_bc849series_bc850series.pdf?folderId=db3a304314dca389011541d30fa21656&fileId=db3a304314dca389011541d4630a1657, ComponentLink3Description="Package Specification", ComponentLink3URL=http://www.infineon.com/dgdl/SOT23-Package_Overview.pdf?folderId=db3a30431936bc4b0119532290053c66&fileId=db3a30431936bc4b0119533468123c85, fT (typ)="250Â MHz", Green=TRUE, IBM (max)="200Â mA", IC (max)="100Â mA", ICBO (max)="15Â nA", ICM (max)="200Â mA", Mounting Technology="Surface Mount", PackageDescription="3-Pin Small Outline Transistor Package, 1.3 x 2.9 mm Body, 0.95 mm Pitch", PackageReference=SOT23, PackageVersion=Apr-08, Packing=Reel, PartNumber=BC847B, Polarity=NPN, Ptot (max)="330Â mW", VCBO (max)="50Â V", VCEO (max)="45Â V", VEBO (max)="6Â V"
Q5: library part CMP-06366-000029-1, "TRANS PNP 60V 0.6A TO39"
R1 R2 R3 R4 R5 R6 R7 R8 R9 R10 R11 R12 R13 R16 R30: "Resistor", LatestRevisionDate=17-Jul-2002, LatestRevisionNote="Re-released for DXP Platform.", PackageDescription="Axial Device, Thru-Hole; 2 Leads; 0.3 in Pin Spacing", PackageReference=AXIAL-0.3, Published=8-Jun-2000, Publisher="Altium Limited"
R14 R15: library part Res1, "Resistor", LatestRevisionDate=17-Jul-2002, LatestRevisionNote="Re-released for DXP Platform.", PackageDescription="Axial Device, Thru-Hole; 2 Leads; 0.3 in Pin Spacing", PackageReference=AXIAL-0.3, Published=8-Jun-2000, Publisher="Altium Limited"
R17 R20 R21 R22 R24 R25 R34 R35 R36 R37 R38 R39: library part CMP-2001-04896-1, Manufacturer="Vishay Dale", Part Number=CRCW08050000Z0EA
R18 R19 R23 R29: library part CMP-0975-00021-1, "Square Trimpot Trimming Potentiometer, 100 KOhm, 0.25 W, -55 to 125 degC, 3-Pin THD, RoHS, Tube", Manufacturer=Bourns, Operating Temperature="-55 to 125 degC", PartNumber=3266W-1-104LF, Power Rating@70 degC="0.25 W", Resistance="100 kOhm", Tolerance=+/-10%, ComponentLink1Description="Manufacturer URL", ComponentLink1URL=https://www.bourns.com/, ComponentLink2Description=Datasheet, ComponentLink2URL=https://www.bourns.com/data/global/pdfs/3266.pdf, ComponentLink3Description="Package Specification", ComponentLink3URL=https://www.bourns.com/data/global/pdfs/3266.pdf, DatasheetVersion=Apr-14, Mounting Technology="Through Hole", PackageDescription="3-Pin THD, Body 6.35 x 4.31 mm, Pitch 2.54 mm", Packing=Tube, RoHS=TRUE
R26 R27 R28 R31 R32 R33: library part CMP-2100-03671-1, "Chip Resistor, 1 KOhm, +/- 1%, 125 mW, -55 to 155 degC, 0805 (2012 Metric), RoHS, Tape and Reel", Case Code (Imperial)=0805, Case Code (Metric)=2012, Manufacturer=Yageo, Max Operating Temperature=155degC, Max Power Dissipation=125mW, Min Operating Temperature=-55degC, Package Description="2-Pin Surface Mounted Device, Body 2 x 1.25 mm", Package Quantity=1, Resistance=1KOhm, Temperature Coefficient=100ppm/degreesC, Tolerance=1%, Voltage Rating=150V, Case/Package=0805, Composition=ThickFilm, Datasheet URL=http://www.yageo.com/NewPortal/yageodocoutput?fileName=/pdf/R-Chip/PYu-RC_Group_51_RoHS_L_5.pdf, Datasheet Version="Rev. 5, 10/2016", Depth=1.25mm, Height=0.024inch, Lead Free=LeadFree, Length=0.079inch, Manufacturer URL=http://www.yageo.com/, Military Standard=Not, Number of Pins=2, Number of Terminations=2, Package Reference=0805, Packaging=TapeandReel, Power Rating=125mW, REACH SVHC=Unknown, RoHSCompliant=true, Termination=SMD/SMT, Voltage Rating (DC)=150V, Width=0.049inch
SW1 SW2 SW3 SW4: library part CMP-00287-39841884-1, "EVQ-PAC07K Switch Tactile N.O. SPST Round Button PC Pins 0.02A 15VDC 1N Thru-Hole Bulk", Color=Black, Contact Current Rating=20mA, Contact Resistance=50mΩ, Max Operating Temperature=70°C, Max Voltage Rating (DC)=15V, Min Operating Temperature=-20°C, Operating Force=1N, Actuator Length=3.1mm, Contact Plating="Gold, Silver", Current Rating=20mA, Depth=7.8mm, Electrical Life=100kcycles, Height=7mm, Illumination Type="Illuminated, Non-Illuminated", Lead Free="Lead Free", Length=6mm, Life (Cycles)=100kcycles, Max Current Rating=20mA, Mechanical Life=100kcycles, Mount="Through Hole", NexarPartId=39841884, Number of Positions=2, Orientation=Straight, Packaging=Bulk, Radiation Hardening=No, REACH SVHC=Unknown, RoHS=Compliant, Switch Function=Off-Mom, Switch Travel=250µm, Termination="PC Pins", Throw Configuration=SPST, Voltage Rating (DC)=15V, Width=6mm
U1: library part CMP-04917-000014-1, "IC REG LINEAR 15V 1A TO220-3", Dropout Voltage=2V, Manufacturer="Texas Instruments", Max Junction Temp=+150°C, Max Supply Voltage=30V, Min Supply Voltage=7.5V, Nominal Supply Current=8mA, Output Current=1.5A, Output Voltage=15V, Package=NDE0003B, Temperature="0°C to +125°C", Temperature Range High=+125°C, Temperature Range Low=0°C, Accuracy Percentage=3%, Automotive=No, Category=IC, ComponentLink2Description=Datasheet, ComponentLink2URL=http://www.ti.com/lit/ds/symlink/lm7800.pdf, Device Class L1="Integrated Circuits (ICs)", Device Class L2="Power Management ICs", Device Class L3="Voltage Regulators - Linear", Digikey Description="IC REG LINEAR 15V 1A TO220-3", Height=19.55mm, Ipc Land Pattern Name=TO-220, Lead Free=Yes, Manufacturer Part Number=LM7815CT/NOPB, Mouser Description="Linear Voltage Regulators 15 Volt Reg", Number Of Outputs=1, Octopart=https://octopart.com/lm7815ct%2Fnopb-texas+instruments-23919376, Output Type=Fixed, RoHS=TRUE, Standoff Height=3.3mm
U2: library part CMP-2000-04938-1, "Positive Voltage Regulator, 5 V, 1 A, -40 to 125 degC, 3-Pin TO-220, RoHS, Tube", Manufacturer=FairchildSemiconductor, Maximum Input Voltage=35V, Maximum Output Current=2.2(Typ)A, Maximum Quiescent Current=8mA, Operating Temperature=-40to125degC, Output Voltage=5V, Package=3TO-220AB, Package Description="3-Pin Through Hole Device, Body 10 x 4.5 mm, Pitch 2.54 mm", Package Reference=TO-220, Typical Dropout Voltage @ Current=2@1AV, Accuracy=±4%, Category=LinearRegulator, Datasheet URL=https://datasheet.ciiva.com/26904/lm7805ct-26904988.pdf, Datasheet Version=Aug-12, Line Regulation=100mV, Load Regulation=100mV, Manufacturer URL=https://www.fairchildsemi.com/, Mounting=ThroughHole, Number Of Outputs=1, Output Type=Fixed, Package URL=https://www.fairchildsemi.com/package-drawings/TO/TO220B03.pdf, Packaging=Rail/Tube, Polarity=Positive, Rad Hard=No, Type=Linear
U3: library part CMP-209535-000001-1, "LDO Voltage Regulators 1A, 3.3V", Dropout Voltage=1.1V, Manufacturer="Advanced Monolithic Systems", Max Junction Temp=+125°C, Max Power Dissipation=1.2W, Max Supply Voltage=15V, Nominal Supply Current=5mA, Output Current=1A, Output Voltage=3.3V, Package=AMS1117, Temperature="-40°C to +125°C", Temperature Range Low=-40°C, Automotive=No, Category=IC, ComponentLink2Description=Datasheet, ComponentLink2URL=http://www.advanced-monolithic.com/pdf/ds1117.pdf, Device Class L1="Integrated Circuits (ICs)", Device Class L2="Power Management ICs", Device Class L3="Voltage Regulators - Linear", Height=1.8mm, Ipc Land Pattern Name=SOT229P700X180-4, Lead Free=Yes, Manufacturer Part Number=AMS1117-3.3, Number Of Outputs=1, Octopart=https://octopart.com/ams1117-3.3-advanced+monolithic+systems-25899300, Output Type=Fixed, RoHS=TRUE, Standoff Height=0.64mm, Temperature Range High=+125°C
U4: library part CMP-0062-02469-3, "3-Terminal Negative Regulator, 3-pin TO-220, Pb-Free", Manufacturer="Texas Instruments", PackageTopMarking=NSUZXYTTE#*LM7915CT, PowerWise=N, ComponentLink1Description="Datasheet URL", ComponentLink1URL=http://www.ti.com/general/docs/lit/getliterature.tsp?genericPartNumber=LM7915&fileType=pdf, CompType="LDO IC", PackageDescription="TO-220, Molded, 3 Lead, Straight", PackageReference=NDE0003A, PinCount=3, RoHS=Y
U5: library part CMP-00572-88253303-1, "X9C103 Series 100 Tap Non Volatile 10 kOhm Digital Potentiometer - SOIC-8", Case/Package=SOIC, Manufacturer Lifecycle Status=ACTIVE, Max Input Voltage=5.5V, Max Operating Temperature=85°C, Max Supply Current=1mA, Min Input Voltage=4.5V, Min Operating Temperature=-40°C, Operating Supply Voltage=5V, Resistance=10kΩ, Temperature Coefficient=300ppm/°C, Tolerance=20%, ComponentLink1Description="Manufacturer's Website", ComponentLink1URL=http://www.renesas.com, ComponentLink2Description="Datasheet URL", ComponentLink2URL=https://octopart.com/cad-content/api/get-model-datasheet/15189/88253303, ComponentLink3Description="Manufacturer's Package Drawing", ComponentLink3URL=https://www.renesas.com/en/document/psc/m815-8-lead-narrow-body-small-outline-plastic-package, Contact Plating=Tin, Height=0m, HelpURL=https://octopart.com/cad-content/api/get-model-datasheet/15189/88253303, Interface=SPI, Lead Free="Lead Free", Length=4.9mm, Lifecycle Status=Production, Max Supply Voltage=5.5V, Memory Type=Non-Volatile, Min Supply Voltage=4.5V, Mount="Surface Mount", Number of Circuits=1, Number of Pins=8, Number of Positions=100, Number of Taps=100, Operating Supply Current=1mA, Pitch=1.3mm, Radiation Hardening=No, RoHS=Compliant, Taper=Linear, Width=3.9mm
U6: library part CMP-0055-00806-3, "Dual High Speed, Low Power, Low Distortion Voltage Feedback Amplifiers, 8-pin Narrow SOIC, Pb-Free", Manufacturer="Texas Instruments", Package Reference=D0008A, PackageTopMarking=NSZXTT*LM61*72IM, PowerWise=Y, Code_IPC=SOIC127P600-8, Code_JEDEC=MS-012-AA, ComponentLink1Description="Datasheet URL", ComponentLink1URL=http://www.ti.com/general/docs/lit/getliterature.tsp?genericPartNumber=LM6172&fileType=pdf, CompType=Amplifiers, PackageDescription="SOIC Narrow, 4.9 x 3.9 x 1.45mm, 8 Lead, 1.27mm Pitch", PinCount=8, RoHS=Y
U7: library part CMP-1310-00289-1, "Single Supply Dual Operational Amplifier, 3 to 32 V, 0 to 70 degC, 8-Pin SOIC, Pb-Free, Tape and Reel", Manufacturer="On Semiconductor", PartNumber=LM358ADR2G, ComponentLink1Description="Manufacturer URL", ComponentLink1URL=http://www.onsemi.com/, ComponentLink2Description=Datasheet, ComponentLink2URL=http://www.onsemi.cn/pub_link/Collateral/LM358-D.PDF, ComponentLink3Description="Package Specification", ComponentLink3URL=http://www.onsemi.com/pub_link/Collateral/751-07.PDF, DatasheetVersion="Rev. 27", Mounting Technology="Surface Mount", PackageDescription="8-Pin Small Outline Integrated Circuit, Body 4.9 x 3.9 mm, Pitch 1.27 mm", PackageReference=SOIC-8-751-07, PackageVersion="Rev. AK, 02/2011", Packing="Tape and Reel", RoHS=TRUE, VCC Max (V)=32, VCC Min (V)=3
U8: "Raspberry Pi Board, Arm Cortex-M0+; Core Architecture:Arm; Core Sub-Architecture:Cortex-M0+; Kit Contents:Raspberry Pi Pico Board; No. Of Bits:32Bit; Silicon Core Number:Rp2040; Silicon Manufacturer:Raspberry Pi", Package=None, Check_prices=https://www.snapeda.com/parts/RASPBERRY%20PI%20PICO/Raspberry+Pi/view-part/?ref=eda, MF="Raspberry Pi", MP="RASPBERRY PI PICO", SnapEDA_Link=https://www.snapeda.com/parts/RASPBERRY%20PI%20PICO/Raspberry+Pi/view-part/?ref=snap
W1 W2: library part Jumper, "Jumper Wire", LatestRevisionDate=17-Jul-2002, LatestRevisionNote="Re-released for DXP Platform.", PackageDescription="Radial Cap, Thru-Hole; 2 Leads; 0.2 in Pin Spacing", PackageReference=RAD-0.2, Published=24-Mar-1999, Publisher="Altium Limited"
W3: "Jumper Wire", LatestRevisionDate=17-Jul-2002, LatestRevisionNote="Re-released for DXP Platform.", PackageDescription="Radial Cap, Thru-Hole; 2 Leads; 0.2 in Pin Spacing", PackageReference=RAD-0.2, Published=24-Mar-1999, Publisher="Altium Limited"

## Nets (pads, with @x,y where several pads share a name; then routed paths per layer and width w, separated by ;. In a path a pad name is that pad's centre, name@x,y a point inside that pad or via, vN(x,y) a via of type N, cw(c..) or ccw(c..) an arc to the next point about the centre after c; other vN are vias at no path point)
+3.3V: R34.2 R35.2 R37.2 R38.2 R39.2 U3.2 U8.3V3
+5: C4.1 C6.1 D1.2 D4.1 LS1.2 P2.1 U2.3 U3.3 U5.8
+15: C1.1 C3.1 C5.1 C12.2 C13.1 C18.1 D1.1 D2.2 D3.1 D7.1 Q1.3 U1.3 U2.1 U6.8 U7.8
-15: C8.2 C9.2 C16.1 C19.1 C20.1 D5.1 D6.2 D8.2 Q5.3 U4.3 U6.4 U7.4
CS: U5.7 U8.GP2
GPIO8: R15.1 U8.GP8
GPIO9: R8.1 U8.GP9
GPIO10: R9.1 U8.GP10
GPIO11: R10.1 U8.GP11
GPIO12: R11.1 U8.GP12
GPIO13: R12.1 U8.GP13
GPIO14: R13.1 U8.GP14
GPIO15: R14.1 U8.GP15
INC: U5.1 U8.GP27_A1
NetC2_1: C2.1 D2.1 J1.1 U1.1
NetC7_2: C7.2 D5.2 J1.3 U4.2
NetC11_2: C11.2 W2.1
NetC14_1: C14.1 R19.3 R21.2 R22.2 R24.2 U6.6
NetC14_2: C14.2 P1.1 R19.1 R19.2
NetC15_2: C15.2 R20.2 U7.3
NetC17_1: C17.1 R23.3 R25.2 U7.6
NetC21_1: C21.1 P1.3 Q2.3 R28.1 R31.2 R32.2
NetC21_2: C21.2 Q2.2 Q3.3 R30.1
NetC22_1: C22.1 R32.1
NetC23_1: C23.1 Q6.1 R36.2
NetC24_1: C24.1 SW2.B'
NetC25_1: C25.1 SW4.B'
NetC25_2: C25.2 SW4.A'
NetC26_1: C26.1 SW3.B'
NetC26_2: C26.2 SW3.A' SW4.A
NetD7_2: D7.2 Q1.1 R28.2
NetD8_1: D8.1 Q5.1 R31.1
NetJ2_1: J2.1 Q3.2 R30.2
NetLS1_1: LS1.1 Q6.3
NetP1_2: P1.2 U6.7 W3.1
NetP2_2: P2.2 U8.GP0
NetP2_3: P2.3 U8.GP1
NetP3_1: P3.1 R35.1 U8.GP4
NetP3_3: P3.3 R34.1 U8.GP5
NetQ1_2: Q1.2 Q4.3 R29.1 R29.2
NetQ2_1: Q2.1 R26.1
NetQ3_1: Q3.1 R27.1
NetQ4_1: Q4.1 R29.3 R33.2
NetQ4_2: Q4.2 Q5.2 R33.1 W3.2
NetR1_1: R1.1 R15.2 R16.2
NetR1_2: R1.2 R2.1 R8.2
NetR2_2: R2.2 R3.1 R9.2
NetR3_2: R3.2 R4.1 R10.2
NetR4_2: R4.2 R5.1 R11.2
NetR5_2: R5.2 R6.1 R12.2
NetR6_2: R6.2 R7.2 R13.2
NetR7_1: R7.1 R14.2 W1.1
NetR17_2: R17.2 R18.3 U7.2
NetR21_1: R21.1 W2.2
NetR26_2: R26.2 U8.GP21
NetR27_2: R27.2 U8.GP20
NetR36_1: R36.1 U8.GP22
NetR37_1: R37.1 SW2.B U8.GP3
NetR38_1: R38.1 SW3.B U8.GP7
NetR39_1: R39.1 SW4.B U8.GP6
NetSW1_A': SW1.A' SW2.A
NetSW1_B: SW1.B U8.RUN
"Offset 1": R18.1 R18.2 R22.1 U7.1
"Offset 2": C17.2 R23.1 R23.2 R24.1 U7.7
PWM1: R20.1 U8.GP16
PWM2: R25.1 U8.GP17
RH: C10.2 C11.1 U5.3 U6.1
RL: C1.2 C2.2 C3.2 C4.2 C5.2 C6.2 C7.1 C8.1 C9.1 C12.1 C13.2 C15.1 C16.2 C18.2 C19.2 C20.2 C22.2 C23.2 C24.2 D3.2 D4.2 D6.1 J1.2 J2.2 P2.4 P3.2 Q6.2 R16.1 R17.1 SW2.A' SW3.A U1.2 U2.2 U3.1 U4.1 U5.4 U5.6 U6.3 U6.5 U7.5 U8.GND7 | length 0
RW: C10.1 U5.5 U6.2 W1.2
U/D: U5.2 U8.GP28_A2
pads on no net: SW1.A SW1.B' U3.4 U8.3V3_EN U8.ADC_VREF U8.AGND U8.GND U8.GND2 U8.GND3 U8.GND4 U8.GND5 U8.GND6 U8.GP18 U8.GP19 U8.GP26_A0 U8.VBUS U8.VSYS

## Text inside footprints (layer, text, board x,y; h text height)
C1: Top Overlay "+" at 54.737,109.342 h1.5 r90
C2: Top Overlay "+" at 34.908,123.237 h1.5 r180
C3: Top Overlay "+" at 34.908,117.237 h1.5 r180
C4: Top Overlay "+" at 60.237,109.342 h1.5 r90
C7: Top Overlay "+" at 44.763,116.908 h1.5 r270
C8: Top Overlay "+" at 39.263,116.908 h1.5 r270
U8: Top Overlay "rasberry pi pico" at 453.537,60.368 h2.54; Top Overlay ">NAME" at 447.187,46.398 h2.54